# Altium PCB EVB_CBDR_AK376xE_V1.0.1.PcbDoc (part 1 of 2)
Units mil, origin at the board's own origin, x right, y up, seen from the top; angles counter-clockwise.
Board outline 1970 x 2130.01 mil, 4 copper layers (Top, Inner Layer 2, Inner Layer 3, Bottom), stack 35.4 mil thick; 164 components, 157 nets, 670 pads, 755 vias.
Unrouted connection lines stored in the file: 527.
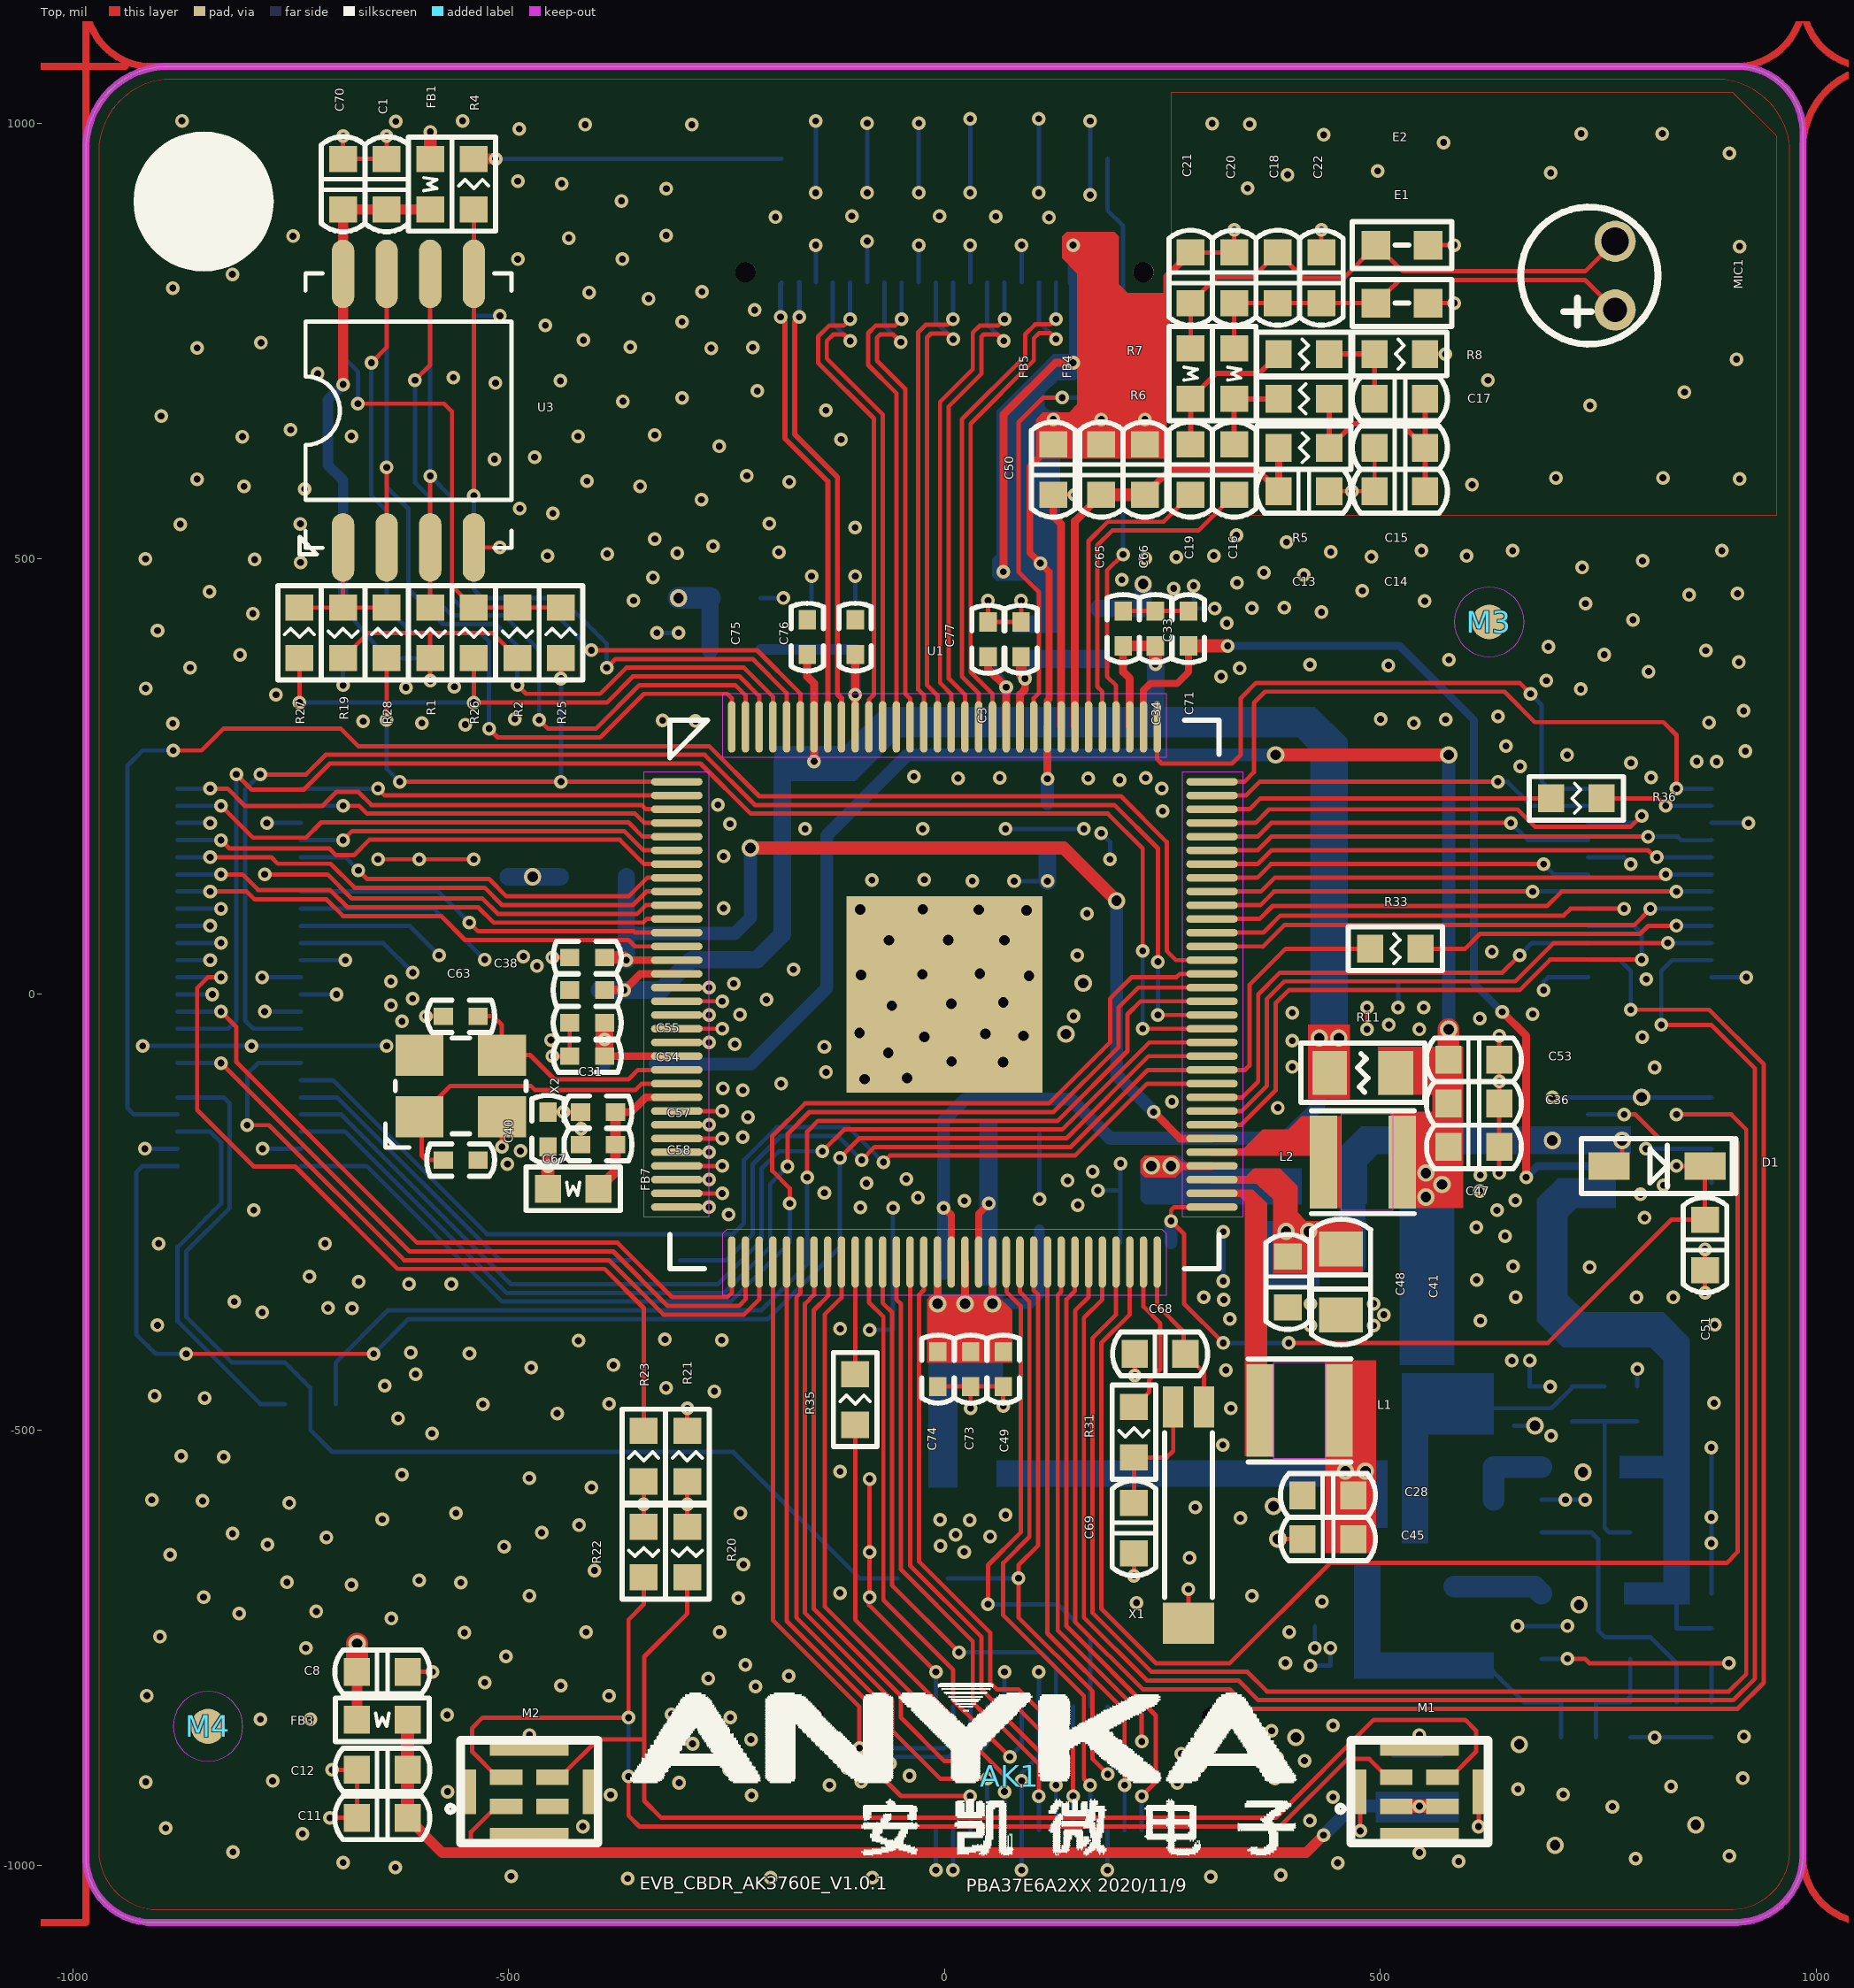
[diagram p0: Top view]
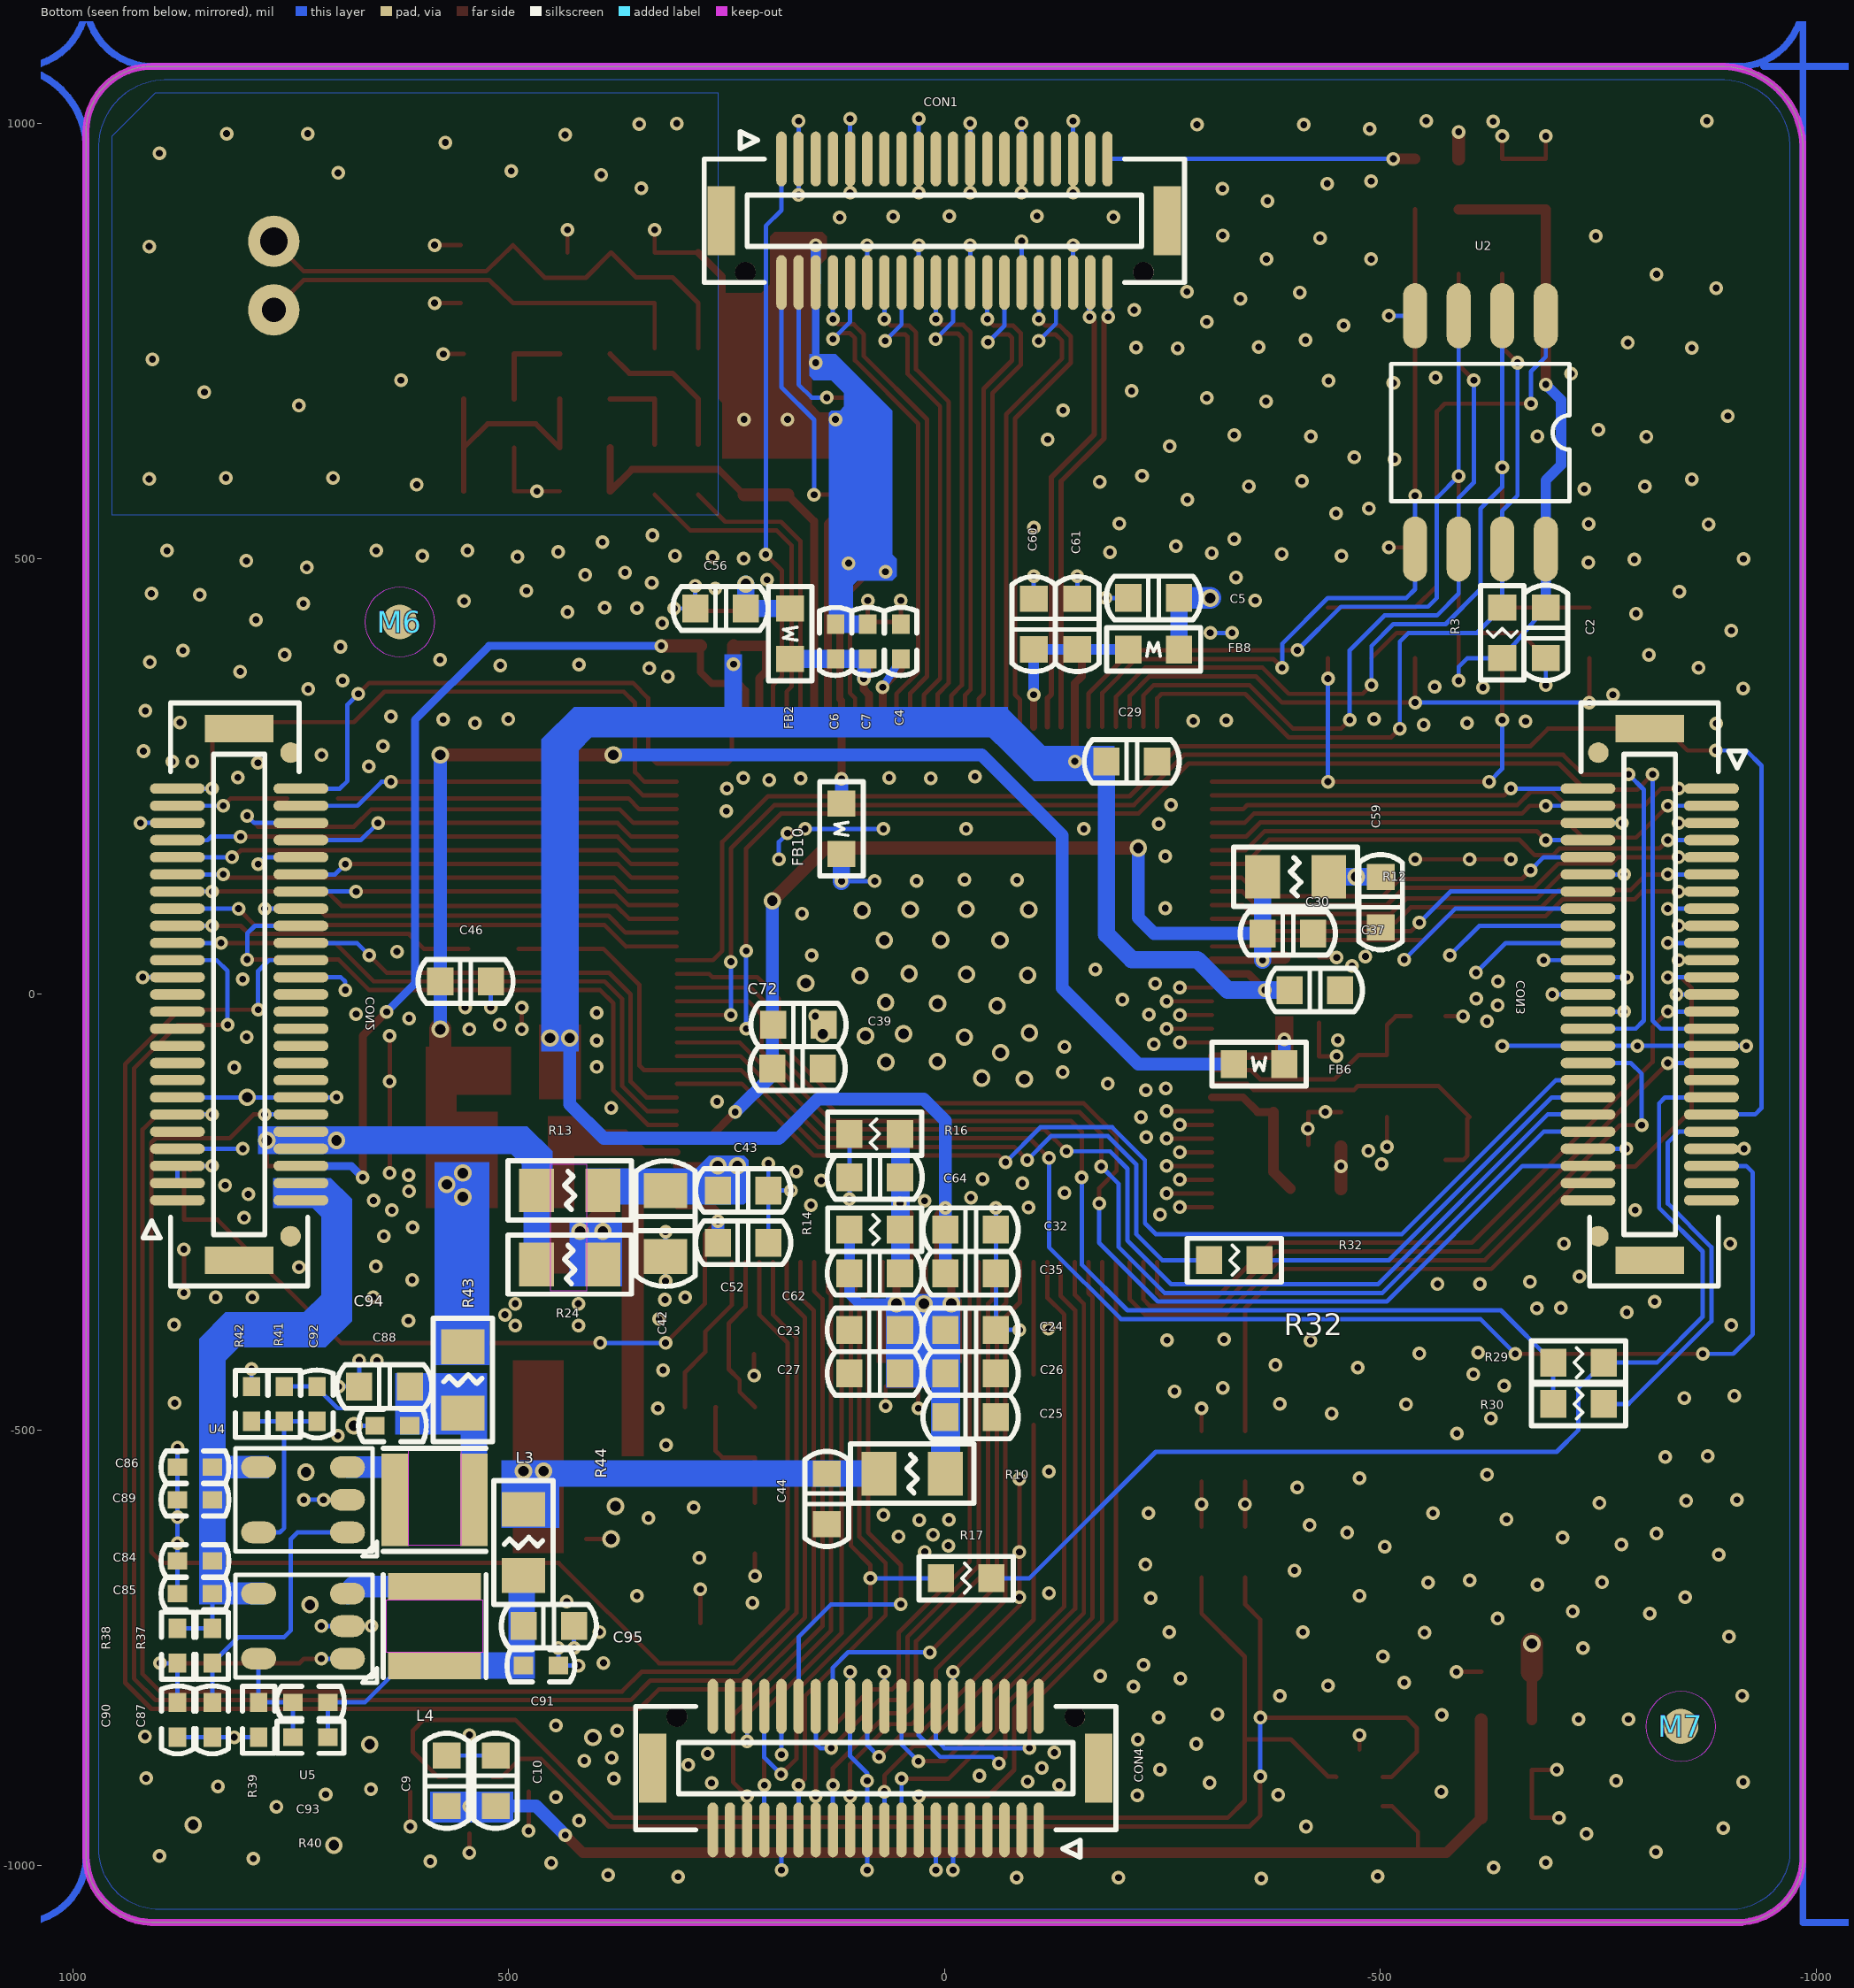
[diagram p1: Bottom view, seen from below]
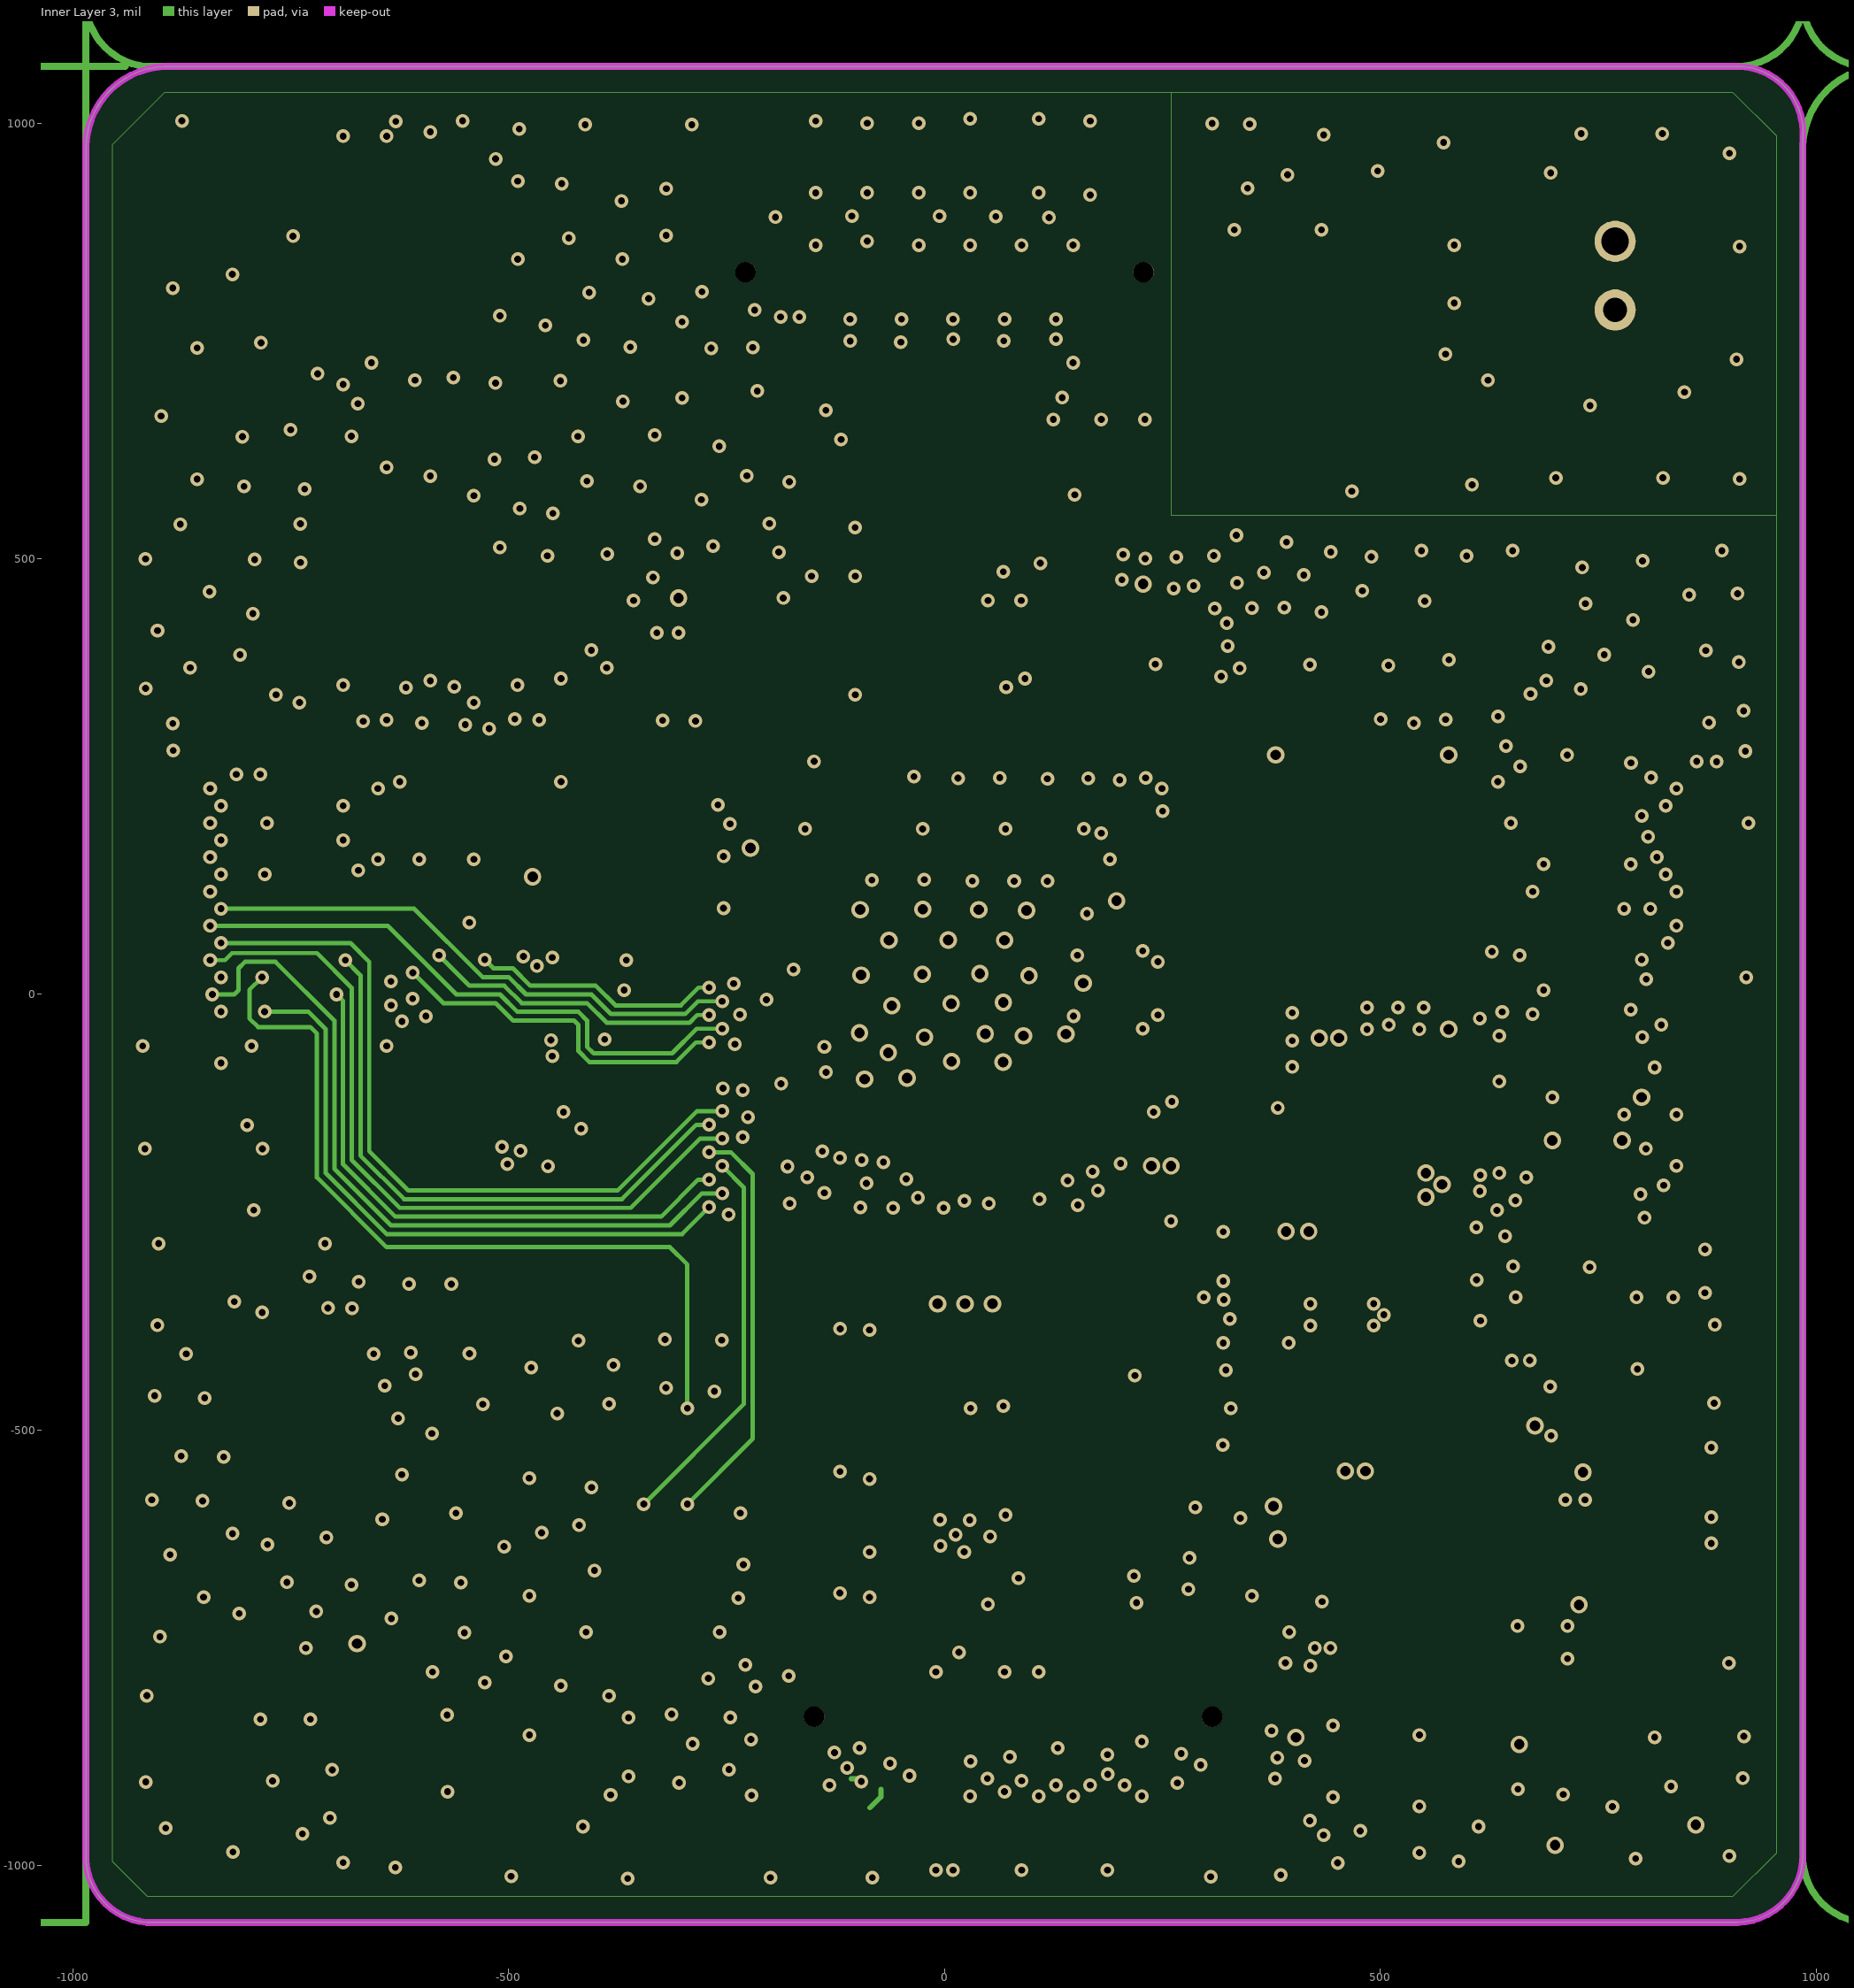
[diagram p2: Inner Layer 3]

## Layer stack, top to bottom
Solder Mask Top: solder mask 0.4, Solder Resist, Dk 3.5
Top: signal copper 1.35
Dielectric 1: dielectric 10, FR-4, Dk 4.3
Inner Layer 2: signal copper 1.35
Dielectric2: dielectric 10, FR-4, Dk 4.3
Inner Layer 3: signal copper 1.35
Dielectric3: dielectric 10, FR-4, Dk 4.3
Bottom: signal copper 1.35
Solder Mask Bottom: solder mask 0.4, Solder Resist, Dk 3.5

## Board outline
-985,-995 -985,-995.04 ccw(c-909.5,-989.5) -915,-1065 910,-1065 909.94,-1065 ccw(c908.33,-988.33) 985,-990 985,990 ccw(c910,990) 910,1065 -895,1065 -895.01,1065 ccw(c-891.07,971.07) -985,975

## Design rules (kind name [scope] priority, off if disabled: settings)
Clearance "Clearance - Net - AGND" [InNet('AGND')] p1: gap=5 ignorepadtopadclearanceinfootprint=FALSE except(0: Arc-Hole Track-Hole SMDPad-Hole THPad-Hole Via-Hole Fill-Hole Poly-Hole Region-Hole Text-Hole; 8: Arc-Fill Arc-Poly Arc-Region Track-Fill Track-Poly Track-Region SMDPad-Fill SMDPad-Poly SMDPad-Region THPad-Fill THPad-Poly THPad-Region Via-Fill Via-Poly Via-Region Fill-Fill Fill-Poly Fill-Region Poly-Poly Poly-Region Region-Region; 10: Text-Text)
Clearance "Clearance - Default - DEFAULT- SMD" [IsVia vs IsSMTPin] p2: gap=0 ignorepadtopadclearanceinfootprint=FALSE
Clearance "Clearance - Default - DEFAULT - Via" [IsVia vs IsVia] p3: gap=0 ignorepadtopadclearanceinfootprint=FALSE
Clearance "Clearance - Default - DEFAULT - Net" [All] p4: gap=5 ignorepadtopadclearanceinfootprint=FALSE except(0: Arc-Hole Track-Hole SMDPad-Hole THPad-Hole Via-Hole Fill-Hole Poly-Hole Region-Hole Text-Hole; 6: Arc-Fill Arc-Poly Arc-Region Track-Fill Track-Poly Track-Region THPad-Fill THPad-Poly THPad-Region Via-Fill Via-Poly Via-Region Fill-Fill Fill-Poly Fill-Region Poly-Poly Poly-Region Region-Region; 8: SMDPad-Fill SMDPad-Poly SMDPad-Region; 10: Text-Text)
ComponentClearance "ComponentClearance - Default - DEFAULT" [All] p1: gap=0 collisioncheckmode=3 verticalgap=10 showdistances=FALSE
FanoutControl Fanout_Small [(CompPinCount < 5)] p3: bgadir=Out bgaviamode=Centered fanoutstyle=Auto fanoutdirection=OutThenIn viagrid=1 // Fanout_Small (Default Rule)
FanoutControl Fanout_SOIC [IsSOIC] p4: bgadir=Out bgaviamode=Centered fanoutstyle=Auto fanoutdirection=Alternating viagrid=1 // Fanout_SOIC (Default Rule)
HoleToHoleClearance "HoleToHoleClearance - Default - DEFAULT" [All] p1: gap=0 allowstackedmicrovias=TRUE
Length "Default Length" [All] p1: maxlimit=50000 minlimit=0
MaxMinImpedance "Default Impedance" [All] p1: minimum=50.00 maximum=150.0
ParallelSegment "Default Parallel Segment Same Layer" [All] p1: limit=1000 gap=200
ParallelSegment "Default Parallel Segment Adjasent" [All] p2: limit=1000 gap=200
PlaneConnect "Default PlaneConnect" [All] p1: planeconnectstyle=Direct reliefexpansion=20 reliefentries=4 reliefconductorwidth=10 reliefairgap=10
PolygonConnect "PolygonConnect - Default SMT" [IsSMTPin] p1: connectstyle=Direct reliefconductorwidth=10 reliefentries=4 polygonreliefangle="45 Angle" airgapwidth=10
PolygonConnect "PolygonConnect - Default Pad" [All] p2: connectstyle=Direct reliefconductorwidth=10 reliefentries=4 polygonreliefangle="45 Angle" airgapwidth=10
RoutingLayers "RoutingLayers - Default - DEFAULT" [All] p1: top layer_v5=TRUE mid layer 1_v5=TRUE mid layer 2_v5=TRUE bottom layer_v5=TRUE
RoutingPriority "RoutingPriority - Default - DEFAULT" [All] p1: routingpriority=3
RoutingTopology "Default Routing Topology" [All] p1: topology=Shortest
RoutingVias "RoutingVias - Default - DEFAULT" [All] p1: holewidth=7.87 width=15.75 viastyle="Through Hole" minholewidth=7.87 minwidth=15.75 maxholewidth=7.87 maxwidth=15.75
SMDToCorner "SMDToCorner - Default - DEFAULT" [All] p1: distance=0
SolderMaskExpansion [All] p1: expansion=4 istentingtop=FALSE
Width "Default Width" [All] p1: maxlimit=100 minlimit=5 preferedwidth=5
20 further rules are at their usual default settings.

## Components (designator, comment, footprint, x,y, rotation, side; value= is the part's Value field where it differs from the comment)
AK1 "LOGO_AK2020" LOGO_AK2020 75,-897.5 r0 top
C1 "C0603" C0603 -640,930 r90 top
C2 "C0603" C0603 -690,415 r90 bottom
C3 "C0402" C0402 50,407.5 r270 top
C4 "C0402" C0402 50,405 r270 bottom
C5 "C0603" C0603 -240,455 r180 bottom
C6 "C0402" C0402 125,405 r270 bottom
C7 "C0402" C0402 88,405 r270 bottom
C8 "C0603" C0603 -645,-777.5 r0 top
C9 "C0603" C0603 571,-902.5 r90 bottom
C10 "C0603" C0603 515,-902.5 r90 bottom
C11 "C0603" C0603 -645,-945 r180 top
C12 "C0603" C0603 -645,-890 r180 top
C13 "C0603" C0603 412.5,577.5 r0 top
C14 "C0603" C0603 522.5,577.5 r180 top
C15 "C0603" C0603 522.5,627.5 r180 top
C16 "C0603" C0603 332.5,602.5 r90 top
C17 "C0603" C0603 522.5,683.5 r180 top
C18 "C0603" C0603 382.5,822.5 r90 top
C19 "C0603" C0603 282.5,602.5 r90 top
C20 "C0603" C0603 332.5,822.5 r90 top
C21 "C0603" C0603 282.5,822.5 r90 top
C22 "C0603" C0603 432.5,822.5 r90 top
C23 "C0603" C0603 80,-385 r180 bottom
C24 "C0603" C0603 -30,-385 r0 bottom
C25 "C0603" C0603 -30,-485 r0 bottom
C26 "C0603" C0603 -30,-435 r0 bottom
C27 "C0603" C0603 80,-435 r180 bottom
C28 "C0603" C0603 440,-575 r0 top
C29 "C0603" C0603 -215,267.5 r0 bottom
C30 "C0603" C0603 -425,5 r0 bottom
C31 "C0402" C0402 -410,5 r0 top
C32 "C0603" C0603 -30,-270 r0 bottom
C33 "C0402" C0402 205,420 r270 top
C34 "C0402" C0402 242,420 r270 top
C35 "C0603" C0603 -30,-320 r0 bottom
C36 "C0603" C0603 607.5,-125 r180 top
C37 "C0603" C0603 -394,70 r0 bottom
C38 "C0402" C0402 -410,42.5 r0 top
C39 "C0603" C0603 167.5,-35 r0 bottom
C40 "C0402" C0402 -455,-155 r270 top
C41 "C0805" C0805 455,-330 r270 top
C42 "C0805" C0805 320,-263 r270 bottom
C43 "C0603" C0603 231,-225 r180 bottom
C44 "C0603" C0603 135,-579 r270 bottom
C45 "C0603" C0603 440,-625 r180 top
C46 "C0603" C0603 549.5,15 r180 bottom
C47 "C0603" C0603 607.5,-175 r0 top
C48 "C0603" C0603 394,-330 r270 top
C49 "C0402" C0402 67.5,-430 r270 top
C50 "C0603" C0603 125,602.5 r90 top
C51 "C0603" C0603 872.62,-287.5 r270 top
C52 "C0603" C0603 231,-285 r180 bottom
C53 "C0603" C0603 607.5,-75 r0 top
C54 "C0402" C0402 -410,-70.87 r180 top
C55 "C0402" C0402 -410,-32.5 r180 top
C56 "C0603" C0603 257,443 r0 bottom
C57 "C0402" C0402 -397.5,-135 r180 top
C58 "C0402" C0402 -397.5,-172.5 r180 top
C59 "C0603" C0603 -500.5,106 r270 bottom
C60 "C0603" C0603 -102.36,425 r90 bottom
C61 "C0603" C0603 -152.5,425 r90 bottom
C62 "C0603" C0603 80,-320 r180 bottom
C63 "C0402" C0402 -555,-25 r180 top
C64 "C0603" C0603 80,-210 r0 bottom
C65 "C0603" C0603 180,602.5 r90 top
C66 "C0603" C0603 230,602.5 r90 top
C67 "C0402" C0402 -555,-190 r0 top
C68 "C0603" C0603 247.5,-412.5 r180 top
C69 "C0603" C0603 217.5,-612.5 r270 top
C70 "C0603" C0603 -690,930 r90 top
C71 "C0402" C0402 280,420 r90 top
C72 "C0603" C0603 168.5,-85 r180 bottom
C73 "C0402" C0402 30,-430 r270 top
C74 "C0402" C0402 -7.5,-430 r270 top
C75 "C0402" C0402 -157.5,410 r270 top
C76 "C0402" C0402 -102.36,410 r270 top
C77 "C0402" C0402 88,407.5 r270 top
C84 "C0402" C0402 860,-650 r0 bottom
C85 "C0402" C0402 860,-687.6 r0 bottom
C86 "C0402" C0402 860,-542.6 r0 bottom
C87 "C0402" C0402 840,-832.5 r270 bottom
C88 "C0402" C0402 633.5,-495 r0 bottom
C89 "C0402" C0402 860,-580 r0 bottom
C90 "C0402" C0402 880,-832.5 r270 bottom
C91 "C0402" C0402 463,-770.28 r180 bottom
C92 "C0402" C0402 720,-470 r270 bottom
C93 "C0402" C0402 727.5,-812.5 r0 bottom
C94 "C0603" C0603 642.5,-450 r0 bottom
C95 "C0603" C0603 454,-725 r180 bottom
CON1 "CON20X2_0MM5_BTB_DF12_N" CON20X2_0MM5_BTB_DF12_N 0,887.99 r0 bottom
CON2 "CON25X2_0MM5_BTB_DF12_N" CON25X2_0MM5_BTB_DF12_N 809.25,0 r270 bottom
CON3 "CON25X2_0MM5_BTB_DF12_N" CON25X2_0MM5_BTB_DF12_N -809.25,0 r90 bottom
CON4 "CON20X2_0MM5_BTB_DF12_N" CON20X2_0MM5_BTB_DF12_N 78.74,-887.99 r180 bottom
D1 "1N5819_SOD123_1MM7X3MM85" 1N5819_SOD123_1MM7X3MM85 817.5,-196.85 r0 top
E1 "ESD0603" ESD0603 525,793.5 r0 top
E2 "ESD0603" ESD0603 525,860 r0 top
FB1 "FB0603" FB0603 -590,930 r90 top
FB2 "FB0603" FB0603 177,414 r270 bottom
FB3 "FB0603" FB0603 -645,-832.5 r0 top
FB4 "FB0603" FB0603 332.5,712.5 r90 top
FB5 "FB0603" FB0603 282.5,712.5 r90 top
FB6 "FB0603" FB0603 -361,-80 r180 bottom
FB7 "FB0603" FB0603 -426,-223 r0 top
FB8 "FB0603" FB0603 -240,396 r0 bottom
FB10 "FB0603" FB0603 118.11,190 r270 bottom
L1 "L_SWPA3012_3X3MM" L_SWPA3012_3X3MM 407.5,-477.5 r0 top
L2 "L_SWPA3012_3X3MM" L_SWPA3012_3X3MM 480,-192.5 r0 top
L3 "L_SWPA3012_3X3MM" L_SWPA3012_3X3MM 585,-580 r180 bottom
L4 "L_SWPA3012_3X3MM" L_SWPA3012_3X3MM 585,-725 r270 bottom
M1 "MSM261D4030H1R" MSM261D4030H1R 545,-915 r90 top
M2 "MSM261D4030H1R" MSM261D4030H1R -476.28,-915 r90 top
M3 "FIDU_40" FIDU_40 625,427.5 r0 top
M4 "FIDU_40" FIDU_40 -845,-840 r0 top
M6 "FIDU_40" FIDU_40 625,427.5 r180 bottom
M7 "FIDU_40" FIDU_40 -845,-840 r180 bottom
MIC1 "MIC_4MM_DIP" MIC_4MM_DIP 740,825 r270 top
R1 "R0603" R0603 -590,415 r90 top
R2 "R0603" R0603 -490,415 r90 top
R3 "R0603" R0603 -640,415 r90 bottom
R4 "R0603" R0603 -540,930 r270 top
R5 "R0603" R0603 412.5,627.5 r180 top
R6 "R0603" R0603 412.5,683.5 r0 top
R7 "R0603" R0603 412.5,735 r180 top
R8 "R0603" R0603 522.5,735 r180 top
R10 "R0805" R0805 37,-550 r180 bottom
R11 "R0805" R0805 480,-90 r180 top
R12 "R0805" R0805 -403,135 r0 bottom
R13 "R0805" R0805 430,-225 r0 bottom
R14 "R0603" R0603 80,-270 r0 bottom
R16 "R0603" R0603 80,-160 r180 bottom
R17 "R0603" R0603 -25,-670 r0 bottom
R19 "R0603" R0603 -690,415 r90 top
R20 "R0603" R0603 -295,-640 r90 top
R21 "R0603" R0603 -295,-530 r270 top
R22 "R0603" R0603 -345,-640 r90 top
R23 "R0603" R0603 -345,-530 r270 top
R24 "R0805" R0805 430,-310 r0 bottom
R25 "R0603" R0603 -440,415 r270 top
R26 "R0603" R0603 -540,415 r270 top
R27 "R0603" R0603 -740,415 r270 top
R28 "R0603" R0603 -640,415 r270 top
R29 "R0603" R0603 -727.5,-422.5 r0 bottom
R30 "R0603" R0603 -727.5,-470 r0 bottom
R31 "R0603" R0603 217.5,-502.5 r90 top
R32 "R0603" R0603 -332.5,-305 r0 bottom
R33 "R0603" R0603 517.5,52.5 r180 top
R35 "R0603" R0603 -102.36,-465 r270 top
R36 "R0603" R0603 725,225 r180 top
R37 "R0402" R0402 840,-747.5 r90 bottom
R38 "R0402" R0402 880,-747.5 r90 bottom
R39 "R0402" R0402 786.97,-832.5 r90 bottom
R40 "R0402" R0402 727.5,-852.5 r180 bottom
R41 "R0402" R0402 757.5,-470 r90 bottom
R42 "R0402" R0402 795,-470 r270 bottom
R43 "R0805" R0805 552.5,-442.5 r270 bottom
R44 "R0805" R0805 483,-629 r270 bottom
U1 "AK376XE_LQFP128_0MM4_16X16MM" AK376XE_LQFP128_0MM4_16X16MM 0,0 r0 top
U2 "GD25Q64ESIG_SOP8_1MM27_5X8MM" GD25Q64ESIG_SOP8_1MM27_5X8MM -615,645 r0 bottom
U3 "GD5F1GQ5UEYIG_SOP8_1MM27_6X8MM" GD5F1GQ5UEYIG_SOP8_1MM27_6X8MM -615,670 r0 top
U4 "PAM2312_SOT23-5" PAM2312_SOT23-5 735,-580 r90 bottom
U5 "PAM2312_SOT23-5" PAM2312_SOT23-5 735,-725 r90 bottom
X1 "MC146" MC146 280,-597.5 r180 top
X2 "KSX23" KSX23 -555,-105 r0 top

## Footprints (in the part's own frame and the unit in brackets; to place one, negate y for a bottom-side part, rotate by r counter-clockwise, add the part's x,y. Pads: shape width x height; smd on the part's side, far side on the other; paste and mask are expansions set on the pad)
1N5819_SOD123_1MM7X3MM85 [mm]
  rect 1.2x0.8 smd: A(-1.4,0) K(1.4,0)
  silkscreen extent -2.2,-0.8 2.3,0.8
AK376XE_LQFP128_0MM4_16X16MM [mm]
  oval 1.5x0.22 smd: 1(-7.8,6.2) 2(-7.8,5.8) 3(-7.8,5.4) 4(-7.8,5) 5(-7.8,4.6) 6(-7.8,4.2) 7(-7.8,3.8) 8(-7.8,3.4) 9(-7.8,3) 10(-7.8,2.6) 11(-7.8,2.2) 12(-7.8,1.8) 13(-7.8,1.4) 14(-7.8,1) 15(-7.8,0.6) 16(-7.8,0.2) 17(-7.8,-0.2) 18(-7.8,-0.6) 19(-7.8,-1) 20(-7.8,-1.4) 21(-7.8,-1.8) 22(-7.8,-2.2) 23(-7.8,-2.6) 24(-7.8,-3) 25(-7.8,-3.4) 26(-7.8,-3.8) 27(-7.8,-4.2) 28(-7.8,-4.6) 29(-7.8,-5) 30(-7.8,-5.4) 31(-7.8,-5.8) 32(-7.8,-6.2) 65(7.8,-6.2) 66(7.8,-5.8) 67(7.8,-5.4) 68(7.8,-5) 69(7.8,-4.6) 70(7.8,-4.2) 71(7.8,-3.8) 72(7.8,-3.4) 73(7.8,-3) 74(7.8,-2.6) 75(7.8,-2.2) 76(7.8,-1.8) 77(7.8,-1.4) 78(7.8,-1) 79(7.8,-0.6) 80(7.8,-0.2) 81(7.8,0.2) 82(7.8,0.6) 83(7.8,1) 84(7.8,1.4) 85(7.8,1.8) 86(7.8,2.2) 87(7.8,2.6) 88(7.8,3) 89(7.8,3.4) 90(7.8,3.8) 91(7.8,4.2) 92(7.8,4.6) 93(7.8,5) 94(7.8,5.4) 95(7.8,5.8) 96(7.8,6.2)
  oval 0.22x1.5 smd: 33(-6.2,-7.8) 34(-5.8,-7.8) 35(-5.4,-7.8) 36(-5,-7.8) 37(-4.6,-7.8) 38(-4.2,-7.8) 39(-3.8,-7.8) 40(-3.4,-7.8) 41(-3,-7.8) 42(-2.6,-7.8) 43(-2.2,-7.8) 44(-1.8,-7.8) 45(-1.4,-7.8) 46(-1,-7.8) 47(-0.6,-7.8) 48(-0.2,-7.8) 49(0.2,-7.8) 50(0.6,-7.8) 51(1,-7.8) 52(1.4,-7.8) 53(1.8,-7.8) 54(2.2,-7.8) 55(2.6,-7.8) 56(3,-7.8) 57(3.4,-7.8) 58(3.8,-7.8) 59(4.2,-7.8) 60(4.6,-7.8) 61(5,-7.8) 62(5.4,-7.8) 63(5.8,-7.8) 64(6.2,-7.8) 97(6.2,7.8) 98(5.8,7.8) 99(5.4,7.8) 100(5,7.8) 101(4.6,7.8) 102(4.2,7.8) 103(3.8,7.8) 104(3.4,7.8) 105(3,7.8) 106(2.6,7.8) 107(2.2,7.8) 108(1.8,7.8) 109(1.4,7.8) 110(1,7.8) 111(0.6,7.8) 112(0.2,7.8) 113(-0.2,7.8) 114(-0.6,7.8) 115(-1,7.8) 116(-1.4,7.8) 117(-1.8,7.8) 118(-2.2,7.8) 119(-2.6,7.8) 120(-3,7.8) 121(-3.4,7.8) 122(-3.8,7.8) 123(-4.2,7.8) 124(-4.6,7.8) 125(-5,7.8) 126(-5.4,7.8) 127(-5.8,7.8) 128(-6.2,7.8)
  rect 5.72x5.72 smd: 129(0,0)
  silkscreen extent -8,-8 8,8
C0402 [mil]
  rect 22x20 smd: 1(-20,0) 2(20,0)
  silkscreen extent -39,-19 39,19
C0603 [mil]
  rect 30x32 smd: 1(-29,0) 2(29,0)
  silkscreen extent -55,-25 55,25
C0805 [mil]
  rect 40x50 smd: 1(-38,0) 2(38,0)
  silkscreen extent -72,-34 72,34
CON20X2_0MM5_BTB_DF12_N [mm]
  oval 0.3x1.6 smd: 1(4.75,-1.8) 2(4.75,1.8) 3(4.25,-1.8) 4(4.25,1.8) 5(3.75,-1.8) 6(3.75,1.8) 7(3.25,-1.8) 8(3.25,1.8) 9(2.75,-1.8) 10(2.75,1.8) 11(2.25,-1.8) 12(2.25,1.8) 13(1.75,-1.8) 14(1.75,1.8) 15(1.25,-1.8) 16(1.25,1.8) 17(0.75,-1.8) 18(0.75,1.8) 19(0.25,-1.8) 20(0.25,1.8) 21(-0.25,-1.8) 22(-0.25,1.8) 23(-0.75,-1.8) 24(-0.75,1.8) 25(-1.25,-1.8) 26(-1.25,1.8) 27(-1.75,-1.8) 28(-1.75,1.8) 29(-2.25,-1.8) 30(-2.25,1.8) 31(-2.75,-1.8) 32(-2.75,1.8) 33(-3.25,-1.8) 34(-3.25,1.8) 35(-3.75,-1.8) 36(-3.75,1.8) 37(-4.25,-1.8) 38(-4.25,1.8) 39(-4.75,-1.8) 40(-4.75,1.8)
  rect 0.8x2 smd: 41(-6.5,0) 42(6.5,0)
  round 0.6 hole 0.6 unplated: 43(-5.8,1.5) 44(5.8,1.5)
  silkscreen extent -7,-2.6 7,1.8
CON25X2_0MM5_BTB_DF12_N [mm]
  oval 0.3x1.6 smd: 1(6,-1.8) 2(6,1.8) 3(5.5,-1.8) 4(5.5,1.8) 5(5,-1.8) 6(5,1.8) 7(4.5,-1.8) 8(4.5,1.8) 9(4,-1.8) 10(4,1.8) 11(3.5,-1.8) 12(3.5,1.8) 13(3,-1.8) 14(3,1.8) 15(2.5,-1.8) 16(2.5,1.8) 17(2,-1.8) 18(2,1.8) 19(1.5,-1.8) 20(1.5,1.8) 21(1,-1.8) 22(1,1.8) 23(0.5,-1.8) 24(0.5,1.8) 25(0,-1.8) 26(0,1.8) 27(-0.5,-1.8) 28(-0.5,1.8) 29(-1,-1.8) 30(-1,1.8) 31(-1.5,-1.8) 32(-1.5,1.8) 33(-2,-1.8) 34(-2,1.8) 35(-2.5,-1.8) 36(-2.5,1.8) 37(-3,-1.8) 38(-3,1.8) 39(-3.5,-1.8) 40(-3.5,1.8) 41(-4,-1.8) 42(-4,1.8) 43(-4.5,-1.8) 44(-4.5,1.8) 45(-5,-1.8) 46(-5,1.8) 47(-5.5,-1.8) 48(-5.5,1.8) 49(-6,-1.8) 50(-6,1.8)
  rect 0.8x2 smd: 51(-7.75,0) 52(7.75,0)
  round 0.6 smd: 53(-7.05,1.5) 54(7.05,1.5)
  silkscreen extent -8.5,-2.8 8.5,2
ESD0603 [mil]
  rect 33x33 smd: 1(-30,0) 2(30,0)
  silkscreen extent -57,-27 57,27
FB0603 [mil]
  rect 30x32 smd: 1(-29,0) 2(29,0)
  silkscreen extent -54,-25 54,25
FIDU_40 [mil]
  round 40 smd: 1(0,0)
  Top keep-out region: 40,0 36.96,15.31 28.28,28.28 15.31,36.96 0,40 0,40 -15.31,36.96 -28.28,28.28 -36.96,15.31 -40,0 -40,0 -36.96,-15.31 -28.28,-28.28 -15.31,-36.96 0,-40 0,-40 15.31,-36.96 28.28,-28.28 36.96,-15.31 40,0
GD5F1GQ5UEYIG_SOP8_1MM27_6X8MM [mm]
  oval 0.65x2 smd: 1(-1.905,-3.988) 2(-0.635,-3.988) 3(0.635,-3.988) 4(1.905,-3.988) 5(1.905,3.988) 6(0.635,3.988) 7(-0.635,3.988) 8(-1.905,3.988)
  silkscreen extent -3.17,-4.19 3,4
GD25Q64ESIG_SOP8_1MM27_5X8MM [mm]
  oval 0.7x1.9 smd: 1(-1.905,-3.4) 2(-0.635,-3.4) 3(0.635,-3.4) 4(1.905,-3.4) 5(1.905,3.4) 6(0.635,3.4) 7(-0.635,3.4) 8(-1.905,3.4)
  silkscreen extent -2.6,-2 2.6,2
KSX23 [mil]
  rect 55.1x47.2 smd: 1(-47.24,-35.43) 2(47.24,-35.43) 3(47.24,35.43) 4(-47.24,35.43)
  silkscreen extent -87,-71 75,55
L_SWPA3012_3X3MM [mm]
  rect 0.8x2.7 smd: 1(-1.15,0) 2(1.15,0)
  silkscreen extent -1.5,-1.5 1.5,1.5
LOGO_AK2020 [mil]
  silkscreen extent -435,-90 329,107
MC146 [mil]
  rect 23.6x47.2 smd: 1(-17.72,-124.02) 2(17.72,-124.02)
  rect 59.1x47.2 smd: 3(0,124.02)
  silkscreen extent -28,-94 28,94
MIC_4MM_DIP [mm]
  round 1.2 / inner round 1.2 / far side round 1.5 hole 0.7: 1(1,0.75)
  round 1.2 / inner round 1.2 / far side round 1.5 hole 0.8: 2(-1,0.75)
  silkscreen extent -2,-2 2,2
MSM261D4030H1R [mm]
  rect 0.45x0.95 smd: 1(-0.425,0.675) 2(-0.425,-0.675) 3(0.425,-0.675) 4(0.425,0.675)
  rect 1.3x0.35 smd: 5(0,-1.725) 7(0,1.725)
  rect 0.35x2.3 smd: 6(-1.225,0) 8(1.225,0)
  silkscreen extent -1.5,-2 1.5,2.4
PAM2312_SOT23-5 [mil]
  oval 25x40 smd: 1(-37.4,-50) 2(0,-50) 3(37.4,-50) 4(37.4,51.97) 5(-37.4,51.97)
  silkscreen extent -65,-84 59,79
R0402 [mil]
  rect 22x20 smd: 1(-20,0) 2(20,0)
  silkscreen extent -38,-19 38,19
R0603 [mil]
  rect 30x32 smd: 1(-29,0) 2(29,0)
  silkscreen extent -54,-25 54,25
R0805 [mil]
  rect 40x50 smd: 1(-38,0) 2(38,0)
  silkscreen extent -71,-34 71,34

## Via types
v1: diameter 15.75, hole 7.87, Top to Bottom, 695 vias
v2: diameter 20, hole 12, Top to Bottom, 60 vias

## Nets (pads, with @x,y where several pads share a name; then routed paths per layer and width w, separated by ;. In a path a pad name is that pad's centre, name@x,y a point inside that pad or via, vN(x,y) a via of type N, cw(c..) or ccw(c..) an arc to the next point about the centre after c; other vN are vias at no path point)
AGND: C6.1 C7.1 C13.2 C14.2 C15.2 C20.2 C21.2 C22.2 C50.2 C65.2 C66.2 CON1.6 E1.2 E2.2 FB10.1 R8.1 U1.105 | length 1604.3
  Top w5: C50.2@125,631.5 125,632.79 v1(125,660) ; v1(180,660) C65.2@180,631.5 C66.2@230,631.5 v1(230,660) ; C21.2@282.5,851.5 C20.2@332.5,851.5 v1(332.5,877.5) ; C22.2@432.5,851.5 v1(432.5,877.5) ; C13.2@441.5,577.5 v1(467.5,577.5) C14.2@493.5,577.5 C15.2@493.5,627.5 ; R8.1@551.5,735 v1(575,735) ; E1.2@555,793.5 v1(585,793.5) ; E2.2@555,860 v1(585,860)
  Top w8: U1.105@118.11,307.09 118.11,337.11 120,339 120,485 v1(110,495) 98,507 98,605.79 C50.2@125,632.79 ; v1(230,660) 255,685 255,824 C21.2@282.5,851.5
  Top w9: v1(67.64,485) 67.64,665.14 127.5,725 v1(147.64,725) ; v1(118.11,247.5) U1.105@118.11,307.09
  Bottom w9: v1(147.64,725) CON1.6@147.64,817.12
  Bottom w12: v1(110,495) 125,480 C6.1@125,425 ; CON1.6@147.64,817.12 v1(147.64,860)
  Bottom w15: C7.1@88,425 C6.1@125,425 ; FB10.1@118.11,219 v1(118.11,247.5)
  other v1: 605.46,584.94 912.45,591.49 701.48,592.94 824.42,592.94 740.77,675.88 849.16,691.15 623.64,704.98 908.81,728.98 912.45,858.47 347.93,925.4 393.76,940.68 695.66,942.86 497.06,945.04 900.81,965.41 572.72,977.78 435.23,986.51 730.58,987.96 823.7,987.96 350.11,998.88 307.19,999.6
AK_DM: CON1.40 U1.121 | length 532.9
  Top w6: v1(-188,777.5) -183,772.5 -183,638 -133.86,588.86 U1.121@-133.86,307.09
  Bottom w5: CON1.40@-188,815 -187.01,815.99 CON1.40@-187.01,817.12
  Bottom w6: v1(-188,777.5) CON1.40@-188,815
AK_DP: CON1.38 U1.120 | length 535.4
  Top w6: v1(-166.5,777.5) -172,772 -172,643 -123.4,594.4 -122.8,593.8 -122.8,344.63 -118.18,340.01 U1.120@-118.11,307.09
  Bottom w5: CON1.38@-167.32,817.12 CON1.38@-166.5,817.12
  Bottom w6: v1(-166.5,777.5) CON1.38@-166.5,817.13
AVCC11_MIPI_DSI: C3.2 C4.2 U1.108 | length 127.7
  Top w9: C3.2@50,387.5 50,373.37 v1(70.87,352.5) U1.108@70.87,307.09
  Bottom w9: C4.2@50,385 v1(70.87,352.5)
AVCC33_MIPI_DSI: C6.2 C7.2 C77.2 FB2.2 U1.107 | length 84.7
  Top w9: U1.107@86.61,307.09 86.61,344.11 92.5,350 v1(92.5,362.5)
  Top w12: C77.2@88,387.5 88,367 v1(92.5,362.5)
AVDD_PLL: C54.1 C55.1 FB6.2 U1.21 | length 149.8
  Top w9: C55.1@-390,-32.5 C54.1@-390,-70.87 -377.5,-70.87 U1.21@-307.09,-70.87
  Bottom w15: FB6.2@-390,-80 v1(-390,-51.5)
AVDD_USB: C60.1 C61.1 C76.2 FB8.2 U1.119 | length 243.6
  Top w8.5: U1.119@-102.36,307.09 v1(-102.36,344)
  Top w9: v1(-102.36,344) C76.2@-102.36,390
  Bottom w12: FB8.2@-211,396 C61.1@-152.5,396 C60.1@-102.36,396 -102.36,386 v1(-102.36,344)
CSI0_I2C_SCL: CON2.36 U1.85 | length 525.9
  Top w5: U1.85@307.09,70.87 365.87,70.87 385.5,90.5 710.46,90.5 718.39,98.43 v1(780,98.43)
  Bottom w5: CON2.36@738.38,98.43 v1(780,98.43)
CSI0_I2C_SDA: CON2.35 U1.84 | length 591.2
  Top w5: U1.84@307.09,55.12 365.5,55 390,79.5 791.57,79.5 v1(810,98.43)
  Bottom w5: v1(810,98.43) CON2.35@880.12,98.43
CSI0_PCLK: CON2.38 U1.87 | length 437.8
  Top w5: U1.87@307.09,102.36 362.36,102.36 378.11,118.11 v1(675,118.11)
  Bottom w5: v1(675,118.11) CON2.38@738.38,118.11
CSI0_PDWN: CON2.33 R33.1 | length 344.5
  Top w5: R33.1@546.5,52.5 597.5,52.5 614.5,69.5 798.26,69.5 807.5,78.74 v1(840,78.74)
  Bottom w5: v1(840,78.74) CON2.33@880.12,78.74
CSI0_RSET: CON2.34 U1.71 | length 725.3
  Top w5: U1.71@307.09,-149.61 340.39,-149.61 380,-110 380,-10 395,5 660,5 695,40 v1(800,40)
  Bottom w5: CON2.34@738.38,78.74 742.5,78.74 791.26,78.74 800,70 v1(800,40)
CSI0_SCLK: CON2.37 U1.86 | length 586.1
  Top w5: U1.86@307.09,86.61 361.61,86.61 376.5,101.5 691.5,101.5 708.11,118.11 v1(840,118.11)
  Bottom w5: v1(840,118.11) CON2.37@880.12,118.11
DDR: C91.1 C93.1 C95.1 L4.2 R40.2 R44.2 | length 385.3
  Bottom w5: C91.1@483,-770.28 C95.1@483,-725 R44.2@483,-667 ; C91.1@483,-770.28 L4.2@585,-770.28 622.78,-770.28 665,-812.5 C93.1@707.5,-812.5 R40.2@707.5,-852.5
GND: C1.2 C2.1 C3.1 C4.1 C5.1 C8.2 C9.2 C10.2 C11.2 C12.2 C23.1 C24.1 C25.1 C26.1 C27.1 C28.1 C29.1 C30.1 C31.1 C32.1 C33.1 C34.1 C35.1 C36.1 C37.1 C38.1 C39.1 C40.1 C41.2 C42.2 C43.2 C44.2 C45.2 C46.2 C47.2 C48.2 C49.2 C51.2 C52.2 C53.2 C54.2 C55.2 C56.2 C57.2 C58.2 C59.2 C60.2 C61.2 C63.2 C64.2 C67.2 C68.2 C69.2 C70.2 C71.2 C72.2 C73.2 C74.2 C75.1 C76.1 C77.1 C84.2 C85.2 C86.2 C87.2 C88.2 C89.2 C90.2 C91.2 C94.2 C95.2 CON1.3 CON1.9 CON1.12 CON1.17 CON1.18 CON1.23 CON1.24 CON1.29 CON1.30 CON1.35 CON1.36 CON2.7 CON2.13 CON2.14 CON2.27 CON2.28 CON2.42 CON2.45 CON3.5 CON3.6 CON3.31 CON3.32 CON3.43 CON3.44 CON4.11 CON4.12 CON4.13 CON4.20 CON4.21 CON4.24 CON4.31 CON4.32 FB10.2 M1.5 M1.6 M1.7 M1.8 M2.2 M2.5 M2.6 M2.7 M2.8 R16.1 R39.1 R42.1 U1.129 U2.4 U3.4 U4.2 U5.2 X1.3 X2.2 X2.4 | length 5234.2
  Top w5: v1(-705,-945) C11.2@-674,-945 C12.2@-674,-890 v1(-702.5,-890) ; v1(-690,985) C70.2@-690,959 C1.2@-640,959 v1(-640,985) ; v1(-650,155.13) v1(-602.5,155.13) v1(-540,155.13) ; C8.2@-616,-777.5 v1(-587.5,-777.5) ; v1(-595,-25) C63.2@-575,-25 ; U3.4@-540,513 v1(-510,513) ; v1(-507.76,-175) X2.2@-507.76,-140.43 ; M2.8@-476.28,-866.77 v1(-476.28,-850) ; C40.1@-455,-135 C57.2@-417.5,-135 C58.2@-417.5,-172.5 ; v1(-450,-70.87) C54.2@-430,-70.87 C55.2@-430,-32.5 ; v1(-450,42.5) C38.1@-430,42.5 ; v1(-86,-556) v1(-86,-640) v1(-86,-692) -86.34,-692.34 -86.34,-701 v1(-9.84,-777.5) ; C74.2@-7.5,-450 C73.2@30,-450 ; v1(30,-475) C73.2@30,-450 ; v1(50,452) C3.1@50,427.5 C77.1@88,427.5 v1(88,452) ; v1(67.5,-472.5) C49.2@67.5,-450 C73.2@30,-450 ; C33.1@205,440 C34.1@242,440 C71.2@280,440 ; v1(217.5,-667.5) C69.2@217.5,-641.5 ; v1(218.5,-437.5) C68.2@218.5,-412.5 ; X1.3@280,-721.52 v1(280,-682.5) ; v2(382.5,-625) C45.2@411,-625 ; v1(477.09,-960) M1.7@477.09,-915 ; v1(485,-40) v1(485,-15) ; v1(545,-985) M1.6@545,-963.23 ; M1.8@545,-866.77 v1(545,-850) ; v1(612.91,-955) M1.5@612.91,-915 ; v1(636.5,-205) C47.2@636.5,-175 C36.1@636.5,-125 C53.2@636.5,-75 v1(636.5,-47.5) ; v1(872.62,-342.5) C51.2@872.62,-316.5 v1(872.62,-292.5)
  Bottom w5: v1(-920,-59.06) v1(-795,-59.06) CON3.32@-738.38,-59.06 ; v1(-917.5,-177.17) CON3.43@-880.12,-177.17 ; CON3.5@-880.12,196.85 v1(-842.5,196.85) ; v1(-782.5,-177.17) CON3.44@-738.38,-177.17 ; v1(-777.5,196.85) CON3.6@-738.38,196.85 ; v1(-690,355) C2.1@-690,386 ; -687.5,-59.06 CON3.32@-738.38,-59.06 ; v1(-640,-59.06) CON3.32@-738.38,-59.06 ; U2.4@-540,778.86 v1(-510,778.86) ; v1(-330,415) v1(-305,415) ; C5.1@-211,455 v1(-185,455) ; C61.2@-152.5,454 v1(-152.5,480) ; CON1.36@-147.64,817.12 v1(-147.64,860) ; v1(-147.64,920) CON1.35@-147.64,958.86 v1(-147.64,1002.5) ; C60.2@-102.36,454 v1(-102.36,480) ; CON1.30@-88.58,817.12 v1(-88.58,864.5) ; v1(-88.58,920) CON1.29@-88.58,958.86 v1(-88.58,1000) ; v1(-86,-385) C24.1@-59,-385 C35.1@-59,-320 C32.1@-59,-270 v1(-59,-245) ; CON1.24@-29.53,817.12 v1(-29.53,860) ; v1(-29.53,920) CON1.23@-29.53,958.86 v1(-29.53,1000) ; CON4.11@-10,-958.86 CON4.11@-9.84,-958.86 v1(-9.84,-1005) ; CON4.12@-9.84,-817.12 v1(-9.84,-777.5) ; v1(9.84,-1005) CON4.13@9.84,-958.86 ; CON1.18@29.53,817.12 v1(29.53,860) ; v1(29.53,920) CON1.17@29.53,958.86 v1(29.53,1005) ; CON4.20@68.9,-817.12 v1(68.9,-777.5) ; v1(70,190) v1(160,190) ; v1(80,130) v1(118.11,130) ; v1(88.58,-1005) v1(88.58,-902.5) 88.58,-893.92 108.27,-874.23 v1(108.27,-777.5) ; CON1.12@88.58,817.12 v1(88.58,860) ; v1(108.27,920) CON1.9@108.27,958.86 v1(108.27,1005) ; v1(109,-235) C64.2@109,-210 R16.1@109,-160 ; v1(167.32,917.5) CON1.3@167.32,958.86 v1(167.32,1002.5) ; v1(176,-225) C43.2@202,-225 ; v1(180,185) 190,175 v1(190,155) ; v1(187.01,-1005) CON4.31@187.01,-958.86 ; v1(187.01,-872.5) CON4.32@187.01,-817.12 ; C52.2@202,-285 C43.2@202,-225 ; v1(202,-194) C43.2@202,-225 ; v1(286,469) C56.2@286,443 v1(310,443) ; v1(320,-329) C42.2@320,-301 v1(320,-272.5) ; v1(420,-770.28) C91.2@443,-770.28 v1(443,-750) ; v1(425,-750) C95.2@425,-725 ; C10.2@515,-873.5 C9.2@571,-873.5 ; v1(520.5,-15) C46.2@520.5,15 ; C88.2@653.5,-495 v2(677.5,-495) ; v1(657.5,-725) U5.2@685,-725 v1(715,-725) ; v1(671.5,-420) C94.2@671.5,-450 v1(695,-450) ; U4.2@685,-580 v1(712.5,-580) v1(735,-580) ; v1(687.5,5) 687.5,14.68 692.5,19.68 CON2.28@738.38,19.69 ; v1(697.5,-118.11) CON2.14@738.38,-118.11 v2(800,-118.11) CON2.13@880.12,-118.11 ; CON2.42@738.38,157.48 779.52,157.48 v1(787.5,149.5) ; R39.1@786.97,-852.5 v1(815,-852.5) C87.2@840,-852.5 C90.2@880,-852.5 ; R42.1@795,-450 v1(795,-430) ; v1(805,-177.17) CON2.7@880.12,-177.17 ; C85.2@880,-687.6 C84.2@880,-650 v1(880,-630) v1(880,-600) C89.2@880,-580 C86.2@880,-542.6 v1(880,-520) ; CON2.27@880.12,19.69 v1(920,19.68) ; CON2.45@880.12,196.85 v1(922.5,196.85)
  Bottom w20: v1(118.11,130) FB10.2@118.11,161
  other v1: -363.57,-1014.55 -199.71,-1013.72 -82.73,-1013.72 -497.15,-1012.06 305.48,-1012.73 386,-1010.71 -630.12,-1001.96 -690.01,-996.26 451.15,-996.67 590,-995 793.02,-991.84 900.51,-988.64 -816.24,-984.16 -736.52,-963.35 -893.61,-956.72 -415,-955 419.21,-948.31 766.42,-932.24 445.88,-921.14 -221.27,-919.17 -383.03,-918.67 709.99,-918.12 -570,-915 658.11,-912.16 833.66,-908.83 -131.75,-907.63 267.23,-905.03 -304.37,-904.73 -916.39,-903.81 -95.3,-903.28 -770.82,-902.64 379.46,-900 916.07,-899.59 -40.1,-896.61 -247.25,-889.53 -111.76,-887.5 293.91,-884.4 413.17,-879.37 381.97,-875.85 271.76,-871.32 -126.17,-870.1 -289.04,-860.05 -222.01,-855.11 917.23,-851.45 375.43,-845.15 445.88,-839.11 -784.78,-831.8 -727.62,-831.83 -245.79,-829.96 -570.52,-826.95 -313.08,-826.09 -385,-805 -915.22,-804.82 -216.82,-794.26 -440.08,-793.2 -527.43,-789.68 -270.88,-784.95 -178.73,-782.17 -228.33,-769.34 391.23,-767.24 -503.02,-759.75 -732.72,-750.18 -900.24,-737.17 -550.72,-732.62 -411.17,-731.97 -258.08,-731.97 395.78,-731.72 -634.57,-716.31 -809.27,-710.63 -720.74,-708.16 220.29,-698.22 433.35,-696.89 -236.53,-692.84 -850.01,-691.86 -476.26,-690 352.71,-690.13 -120,-687 -680.49,-677.54 -555,-675 -754.5,-674.71 -602.81,-672.43 -401.53,-661.09 -230.71,-654.34 281.12,-646.7 -888.36,-643.02 22.63,-639.75 -505.3,-633.63 -4.44,-632.63 -776.64,-631.3 -709.1,-623.15 52.52,-622.03 12.93,-619.97 -816.92,-618.78 -462.15,-617.84 -419.12,-609.17 -5,-603 28.94,-603.17 -645,-602.5 339.54,-601.12 70,-597.5 -560.5,-595.21 -234.18,-595.37 287.7,-588.79 -751.66,-583.86 -851.17,-581.23 -909.4,-580.06 -404.93,-565.84 -476.37,-555.06 -622.66,-551.1 -119.84,-547.52 -875.63,-529.91 -827.13,-530.75 319.49,-517.08 696.09,-506.35 -588.06,-503.87 -626.85,-486.45 -444.39,-480.9 328.74,-474.88 -529.72,-470.49 -384.73,-469.8 883.15,-469.09 -848.82,-463.14 -906.22,-460.59 -263.99,-455.54 -319.5,-451.45 -642.11,-448.98 -606.9,-435.78 322.83,-431.17 -474.22,-428.17 -379.87,-425.4 651.15,-420.38 -544.99,-412.21 -612.4,-410.95 -420.05,-397.51 -320.66,-395.95 -255.52,-396.82 -119.56,-383.79 420,-380 492.5,-380 -902.97,-379.7 883.99,-379.16 615.05,-374.36 327.5,-372.5 504.28,-367.64 -782.95,-365.04 -707.32,-359.9 -679.62,-360.12 420,-355 492.5,-355 -814.86,-352.55 320.61,-350.32 297.5,-347.5 655.57,-347.35 794.2,-347.78 836.24,-347.78 -614.47,-332.36 -565.8,-332.43 -671.95,-329.66 610.65,-327.56 -728.67,-323.65 740.46,-312.99 652.43,-312.17 -901.59,-285.92 -710.8,-285.95 643.32,-277.31 610.34,-267.26 803.41,-256.33 -247.5,-252.5 -792.5,-247.5 633.96,-247.71 -96.31,-244.49 153.1,-241.75 22.88,-236.85 655.12,-236.5 -30.37,-233.13 798.73,-229.39 -137.8,-227.83 614.45,-225.85 825.27,-219.05 -89.49,-216.75 141.39,-213.7 -43.83,-211.78 614.75,-207.39 169.92,-203.18 -501.44,-194.67 -486.54,-179.64 -231.59,-163.75 -417,-154 -225.52,-140.76 -437,-135 382.5,-130 260.88,-122.94 -231.24,-109.84 -254.14,-107.75 -187.5,-102.5 636.5,-100 -135.82,-89.25 398.99,-83.21 814.88,-83.77 -137.8,-59.96 -240.4,-57.15 398.99,-53.02 -451.48,-52.31 800.76,-48.8 545,-40 510,-35 -622.52,-30.92 614.18,-27.46 148.1,-24.88 -234.71,-23.14 675,-22.5 398.99,-20.97 550,-15 -634.91,-12.33 -204.24,-6.08 -610.13,-4.9 -241.84,12.52 -635,15 805.23,17.46 -173.22,28.61 -467.51,32.54 -483.08,43.6 152.5,45 628.24,49.18 163.43,92.8 -253.5,99 32,130.24 -83.33,131.18 -23.08,131.65 -253.5,158.5 -160,190 -25,190 -245.97,195.78 250.33,210.43 -260,217.5 249.52,236.42 201.19,246.17 164.89,248.03 15.58,248.2 63.48,248.76 230.83,248.4 810.88,249.08 -35,250 660.53,261.62 787.75,265.87 886.02,267.12 863.18,267.46 714.62,274.79 919.08,279.24 644.2,285.15 -549.78,309.58 -885.41,310.99 -599.64,311.51 538.54,311.35 877.12,312.15 -666.88,313.45 -285.59,313.79 -323.3,314.49 -492.87,316.06 500.41,315.85 575.08,315.47 635.18,319.1 916.97,325.51 -766.98,343.98 730.15,350.39 -916.57,351.25 -617.83,352.23 -562.33,353.07 690.65,360.26 317.5,365 808.03,370.53 -865.42,374.97 338.83,374.28 509.47,377.65 419.36,378.59 911.55,381.35 578.85,384.18 -808.28,389.89 757.14,389.92 873.6,394.69 692.87,399.06 -902.91,417.69 324,426 790,430 -793.56,437.01 432.5,438.76 352.7,443.58 390,444 735.56,448.65 -356.69,452.1 551.09,451.47 854.53,458.48 910,460 -843.17,462.18 479.55,463.26 263,466 335.81,472.4 203.54,475.9 -334.39,478.65 412.33,481.34 366.4,484.28 731.79,490.06 -738.91,495.81 800.97,497.59 -916.72,499.85 -791.47,499.16 230.31,500.14 266.14,501.83 489.84,502.21 -455.61,503.39 309.03,503.52 599.14,503.2 -387.06,505.66 -306.6,506.64 -190.03,507.64 443.23,507.83 547.26,509.29 652.01,509.29 892.08,509.29 -265.54,514.54 392.51,519.23 -332.38,522.57 335,527 -102.58,535.82 -876.67,539.57 -739.04,540.15 -200.79,540.39 -449.38,552.12 -487.12,557.64 -278.85,567.98 -734.16,580.03 -803.61,583.21 -349.1,583.28 -410.14,589.14 -178.01,588.37 -857.52,591.35 -226.73,595.17 -516.28,614.21 -470.34,616.7 -258.34,629.15 -118.53,636.82 -805.48,640.19 -680.44,640.66 -420.49,640.49 -332.38,642.02 -750.19,648.06 -898.83,663.78 -136.08,670.42 -368.93,680.72 -300.95,684.68 -214.84,692.62 -515.11,701.69 -440.65,704.2 -563.51,708.1 -719.16,712.4 -857.52,742.05 -267.71,741.68 -360.55,742.98 -219.93,742.47 -784.16,747.87 -414.26,750.97 -457.88,767.96 -300.95,771.93 -217.67,785.53 -339.47,798.56 -407.76,805.71 -278.29,806.49 -885.42,810.74 -817.1,826.46 -489.6,843.88 -369.5,843.88 -430.94,868.11 -747.45,870.23 -319.24,871.14 -193.79,892.12 120.05,891.56 58.85,892.68 -106.21,893.25 -5.71,893.25 -370.63,910.73 -319.08,924.89 -439.18,930.56 -489.6,933.39 -487.87,993.4 -412.19,998.23 -289.8,998.23 -629.52,1001.83 -874.87,1002.67 -552.79,1002.67
  other v2: 700.6,-976.43 862.09,-953.09 659.53,-860.68 403.29,-852.74 728.06,-700.48 377.5,-587.5 732.63,-548.39 -91.61,-97.31 -42.81,-95.86 8.17,-76.92 67.27,-77.64 -64.4,-66.88 -22.92,-48.87 90.58,-47.42 46.84,-45.25 139.5,-45.5 -97.39,-44.17 -60.47,-12.88 7.77,-10.54 67.52,-9.07 159.22,13.01 97.01,21.43 -95.57,22.22 -25.33,23.01 40.58,23.8 -63.69,62.1 68.99,62.1 4.26,62.39 94.25,96.41 -96.77,97.36 -24.88,97.68 39.39,97.2
GPIO54: R20.2 R21.2 U1.28 | length 559.4
  Top w5: U1.28@-307.09,-181.1 v1(-270,-181.1) ; R20.2@-295,-611 v1(-295,-585) R21.2@-295,-559
  Inner Layer 3 w5: v1(-295,-585) -220,-510 -220,-206.1 -245,-181.1 v1(-270,-181.1)
GPIO55: R22.2 R23.2 U1.29 | length 550.2
  Top w5: R22.2@-345,-611 v1(-345,-585) R23.2@-345,-559 ; U1.29@-307.09,-196.85 v1(-255,-196.85)
  Inner Layer 3 w5: v1(-345,-585) -230,-470 -230,-221.85 v1(-255,-196.85)
GPIO71: R32.2 R33.2 U1.75 | length 1064
  Top w5: v1(-95,-190) -80,-175 145,-175 233.39,-86.61 U1.75@307.09,-86.61 345,-86.61 350,-81.61 350,11 391.5,52.5 R33.2@488.5,52.5
  Bottom w5: R32.2@-303.5,-305 -250,-305 -220,-275 -220,-195 -187.5,-162.5 -122.5,-162.5 v1(-95,-190)
GPIO76: R29.2 R30.2 U1.80 | length 1338.8
  Top w5: v1(-157.5,-210) -157.5,-157.5 -145,-145 130,-145 210,-65 210,-22.87 225,-7.87 U1.80@307.09,-7.87
  Bottom w5: R30.2@-698.5,-470 R29.2@-698.5,-422.5 -638.5,-362.5 -210,-362.5 -157.5,-310 v1(-157.5,-210)
HPOUT: CON1.4 U1.106 | length 579.1
  Top w5: U1.106@102.36,307.09 102.48,339.98 108.5,346 108.5,461.5 85,485 85,656.5 113.5,685 v1(135,685)
  Bottom w5: v1(135,685) 152.32,685 167.32,700 CON1.4@167.32,817.12
KEY_AIN0: CON1.1 U1.100 | length 671.2
  Top w5: U1.100@196.85,307.09 196.85,354.5 186.5,364.85 186.5,486.5 v1(205,505)
  Bottom w5: CON1.1@187.01,958.86 187.01,900 205,882.01 v1(205,505)
LCD_BL: CON3.34 U1.35 | length 853.2
  Top w5: v1(-800,-150) -775,-150 -620,-305 -385,-305 -322.5,-367.5 -230.1,-367.5 -212.6,-350 U1.35@-212.6,-307.09
  Bottom w5: v1(-800,-150) -800,-91.24 -787.5,-78.74 CON3.34@-738.38,-78.74
LCD_D0: CON3.8 U1.6 | length 444.8
  Top w5: v1(-690,177.17) -679.67,187.5 -367.5,187.5 -345.35,165.35 U1.6@-307.09,165.35
  Bottom w5: CON3.8@-738.38,177.17 -732.5,177.17 v1(-690,177.17)
LCD_D1: CON3.7 U1.7 | length 599.1
  Top w5: v1(-830,177.17) -820.33,167.5 -705.7,167.5 -698,159.8 -677.5,159.8 -659.8,177.5 -372.5,177.5 -344.61,149.61 U1.7@-307.09,149.61
  Bottom w5: CON3.7@-880.12,177.17 -875,177.17 v1(-830,177.17)
LCD_D2: CON3.10 U1.8 | length 458.8
  Top w5: v1(-672.5,142.5) -662.5,132.5 -522.5,132.5 -502.5,112.5 -362.5,112.5 -341.14,133.86 U1.8@-307.09,133.86
  Bottom w5: CON3.10@-738.38,157.48 -687.48,157.48 v1(-672.5,142.5)
LCD_D3: CON3.9 U1.9 | length 602.3
  Top w5: v1(-842.5,157.48) -772.48,157.48 -765,150 -704.39,150 -676.89,122.5 -527.5,122.5 -507.5,102.5 -357.5,102.5 -341.89,118.11 U1.9@-307.09,118.11
  Bottom w5: CON3.9@-880.12,157.48 v1(-842.5,157.48)
LCD_D4: CON3.12 U1.10 | length 537.4
  Top w5: v1(-780,137.8) -707.8,137.8 -680,110 -530,110 -512.5,92.5 -352.36,92.5 -342.5,102.36 U1.10@-307.09,102.36
  Bottom w5: v1(-780,137.8) CON3.12@-738.38,137.8
LCD_D5: CON3.11 U1.11 | length 597.6
  Top w5: v1(-830,137.8) -805.3,137.8 -787.5,120 -705,120 -685,100 -535,100 -517.5,82.5 -345.73,82.5 -341.61,86.61 U1.11@-307.09,86.61
  Bottom w5: CON3.11@-880.12,137.8 v1(-830,137.8)
LCD_D6: CON3.14 U1.12 | length 450.9
  Top w5: v1(-545,82.5) -535,72.5 -356.63,72.5 -355,70.87 U1.12@-307.09,70.87
  Bottom w5: CON3.14@-738.38,118.11 -737.5,118.11 -580.61,118.11 v1(-545,82.5)
LCD_D7: CON3.13 U1.13 | length 599.1
  Top w5: v1(-842.5,118.11) -800.61,118.11 -791.5,109 -709,109 -690,90 -577.5,90 -550,62.5 -362.5,62.5 -355.12,55.12 U1.13@-307.09,55.12
  Bottom w5: CON3.13@-880.12,118.11 -875,118.11 v1(-842.5,118.11)
LCD_D8: CON3.16 U1.16 | length 559.9
  Top w5: U1.16@-307.09,7.87 v1(-270,7.87)
  Inner Layer 3 w5: v1(-527.5,40) -517.5,30 -495,30 -475,10 -400,10 -377.5,-12.5 -302.5,-12.5 -282.13,7.87 v1(-270,7.87)
  Bottom w5: CON3.16@-738.38,98.43 -732.5,98.43 -585.93,98.43 v1(-527.5,40)
LCD_D9: CON3.15 U1.17 | length 733.3
  Top w5: U1.17@-307.09,-7.87 v1(-255,-7.87)
  Inner Layer 3 w5: v1(-830,98.43) -608.43,98.43 -530,20 -500,20 -480,0 -405,0 -382.5,-22.5 -297.5,-22.5 -282.87,-7.87 v1(-255,-7.87)
  Bottom w5: CON3.15@-880.12,98.43 -877.5,98.43 v1(-830,98.43)
LCD_D10: CON3.18 U1.18 | length 555.2
  Top w5: U1.18@-307.09,-23.62 v1(-270,-23.62)
  Inner Layer 3 w5: v1(-580,45) -545,10 -505,10 -485,-10 -410,-10 -387.5,-32.5 -292.5,-32.5 -283.62,-23.62 v1(-270,-23.62)
  Bottom w5: CON3.18@-738.38,78.74 -735,78.74 -613.74,78.74 v1(-580,45)
LCD_D11: CON3.17 U1.19 | length 767
  Top w5: U1.19@-307.09,-39.37 v1(-255,-39.37)
  Inner Layer 3 w5: v1(-842.5,78.74) -638.74,78.74 -560,0 -510,0 -490,-20 -420,-20 -410,-30 -410,-60 -402.5,-67.5 -312.5,-67.5 -284.37,-39.37 v1(-255,-39.37)
  Bottom w5: CON3.17@-880.12,78.74 -875,78.74 v1(-842.5,78.74)
LCD_D12: CON3.20 U1.20 | length 588.9
  Top w5: U1.20@-307.09,-55.12 v1(-270,-55.12)
  Inner Layer 3 w5: v1(-610,25) -575,-10 -515,-10 -495,-30 -425,-30 -420,-35 -420,-65 -407.5,-77.5 -307.5,-77.5 -285.12,-55.12 v1(-270,-55.12)
  Bottom w5: CON3.20@-738.38,59.06 -735,59.06 -644.06,59.06 v1(-610,25)
LCD_D13: CON3.19 U1.25 | length 960
  Top w5: U1.25@-307.09,-133.86 v1(-255,-133.86)
  Inner Layer 3 w5: v1(-830,59.06) -681.56,59.06 -660,37.5 -660,-180 -615,-225 -375,-225 -283.86,-133.86 v1(-255,-133.86)
  Bottom w5: CON3.19@-880.12,59.06 -875,59.06 v1(-830,59.06)
LCD_D14: CON3.22 U1.26 | length 775.7
  Top w5: U1.26@-307.09,-149.61 v1(-270,-149.61)
  Inner Layer 3 w5: v1(-687.5,39.37) -670,21.87 -670,-185 -620,-235 -370,-235 -284.61,-149.61 v1(-270,-149.61)
  Bottom w5: CON3.22@-738.38,39.37 -732.5,39.37 v1(-687.5,39.37)
LCD_D15: CON3.21 U1.27 | length 950.4
  Top w5: U1.27@-307.09,-165.35 v1(-255,-165.35)
  Inner Layer 3 w5: v1(-842.5,39.37) -825.63,39.37 -817.5,47.5 -720,47.5 -680,7.5 -680,-190 -625,-245 -360,-245 -280.35,-165.35 v1(-255,-165.35)
  Bottom w5: CON3.21@-880.12,39.37 -877.5,39.37 v1(-842.5,39.37)
LCD_D16: CON3.24 R21.1 | length 1005
  Top w5: R21.1@-295,-501 v1(-295,-475)
  Inner Layer 3 w5: v1(-783,19.69) -797.5,5.19 -797.5,-27.5 -787.5,-37.5 -727.5,-37.5 -720,-45 -720,-210 -640,-290 -315,-290 -295,-310 v1(-295,-475)
  Bottom w5: v1(-783,19.69) CON3.24@-738.38,19.69
LCD_D17: CON3.23 R23.1 | length 970.4
  Top w5: v1(-830,19.69) -845.31,19.69 -857.5,7.5 -857.5,-132.5 -792.5,-197.5 -745,-197.5 -627.5,-315 -390,-315 -345,-360 R23.1@-345,-501
  Bottom w5: CON3.23@-880.12,19.69 v1(-830,19.69)
LCD_D18: CON3.26 U1.30 | length 738.5
  Top w5: U1.30@-307.09,-212.6 v1(-270,-212.6)
  Inner Layer 3 w5: v1(-697.5,0) -690,-7.5 -690,-195 -630,-255 -325,-255 -282.6,-212.6 v1(-270,-212.6)
  Bottom w5: CON3.26@-738.38,0 v1(-697.5,0)
LCD_D19: CON3.25 U1.31 | length 947.4
  Top w5: U1.31@-307.09,-228.35 v1(-255,-228.35)
  Inner Layer 3 w5: v1(-840,0) -815,0 -810,5 -810,30 -802.5,37.5 -767.5,37.5 -700,-30 -700,-200 -635,-265 -315,-265 -278.35,-228.35 v1(-255,-228.35)
  Bottom w5: CON3.25@-880.12,0 -877.5,0 v1(-840,0)
LCD_D20: CON3.28 U1.32 | length 804.1
  Top w5: U1.32@-307.09,-244.09 v1(-270,-244.09)
  Inner Layer 3 w5: v1(-780,-19.68) -730,-19.68 -710,-39.68 -710,-205 -640,-275 -300.91,-275 v1(-270,-244.09)
  Bottom w5: v1(-780,-19.68) -740,-19.68 CON3.28@-738.38,-19.69
LCD_D21: CON3.27 U1.33 | length 832.9
  Top w5: v1(-830,-19.68) -812.5,-37.18 -812.5,-77.5 -605,-285 -375,-285 -312.5,-347.5 -249.09,-347.5 -244.09,-342.5 U1.33@-244.09,-307.09
  Bottom w5: CON3.27@-880.12,-19.69 v1(-830,-19.68)
LCD_D22: CON3.30 U1.79 | length 1694.8
  Top w5: v1(-785,252.5) -732.5,252.5 -710,275 -275,275 -217.5,217.5 195,217.5 245,167.5 v1(245,37.5) ; v1(245,-23.62) U1.79@307.09,-23.62
  Bottom w5: v1(-785,252.5) -802.5,235 -802.5,-30 -793.13,-39.37 CON3.30@-738.38,-39.37 ; v1(245,-23.62) v1(245,37.5)
LCD_D23: CON3.29 U1.78 | length 1740.5
  Top w5: v1(-812.5,252.5) -795,235 -735,235 -705,265 -280,265 -222.5,207.5 187.5,207.5 227.5,167.5 v1(227.5,50) ; v1(227.5,-39.37) U1.78@307.09,-39.37
  Bottom w5: CON3.29@-880.12,-39.37 -821.87,-39.37 -812.5,-30 v1(-812.5,252.5) ; v1(227.5,-39.37) v1(227.5,50)
LCD_PWR: CON3.40 U1.77 | length 1289.4
  Top w5: v1(-140,-180) -115,-155 135,-155 234.94,-55.06 235,-55.12 U1.77@307.09,-55.12
  Bottom w5: CON3.40@-738.38,-137.8 -735,-137.8 -692.2,-137.8 -497.5,-332.5 -260,-332.5 -210,-282.5 -210,-200 -190,-180 v1(-140,-180)